# Altium PCB adapter.PcbDoc
Units mm, origin at the board's own origin, x right, y up, seen from the top; angles counter-clockwise.
Board outline 44.32 x 45.25 mm, 2 copper layers (Top Layer, Bottom Layer); 5 components, 0 nets, 22 pads, 0 vias.
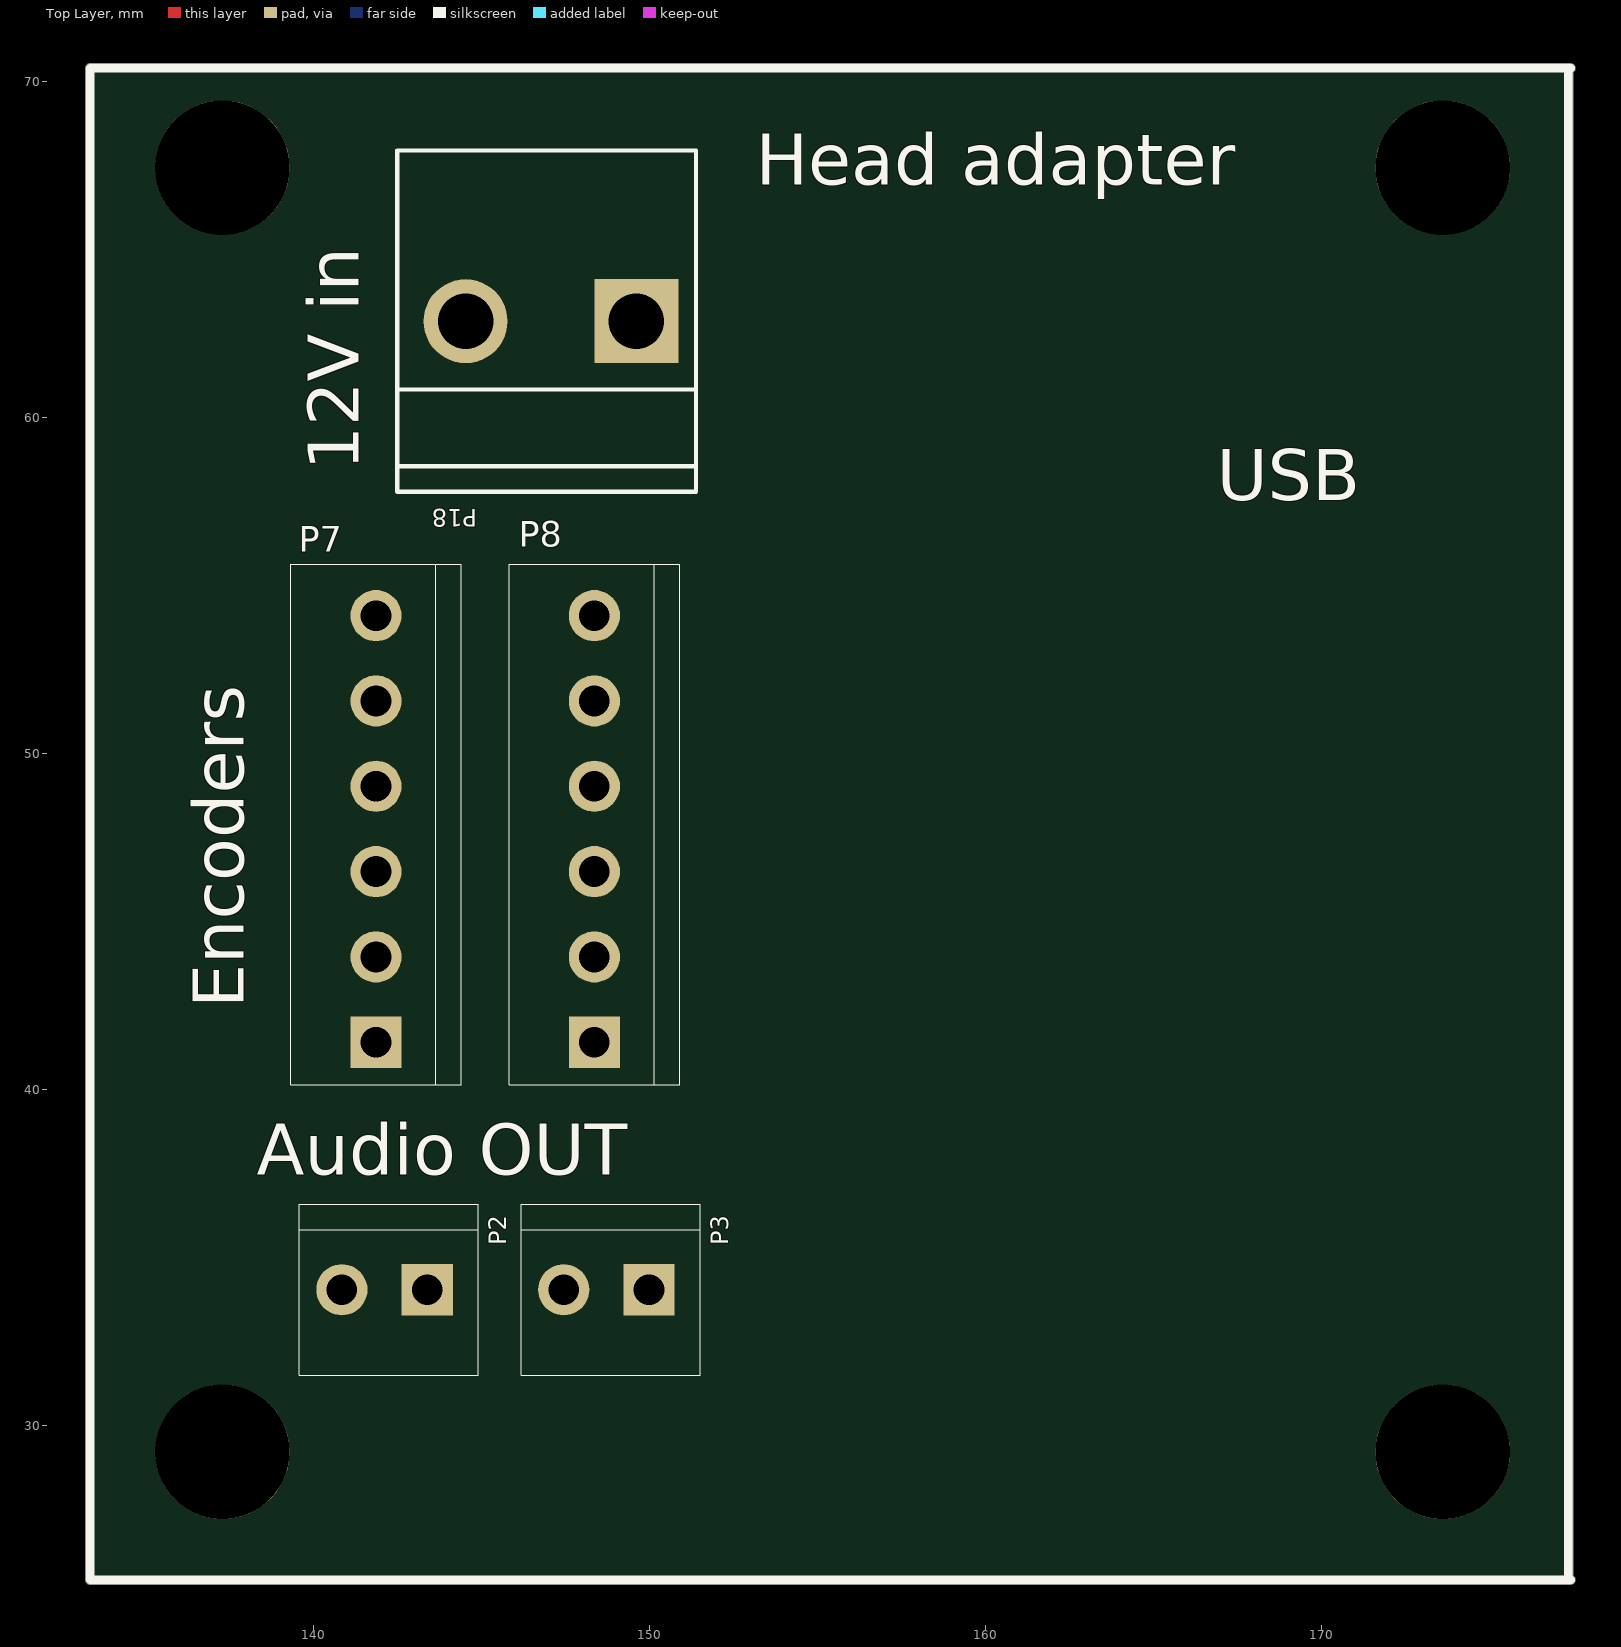
[diagram p0: Top Layer view]
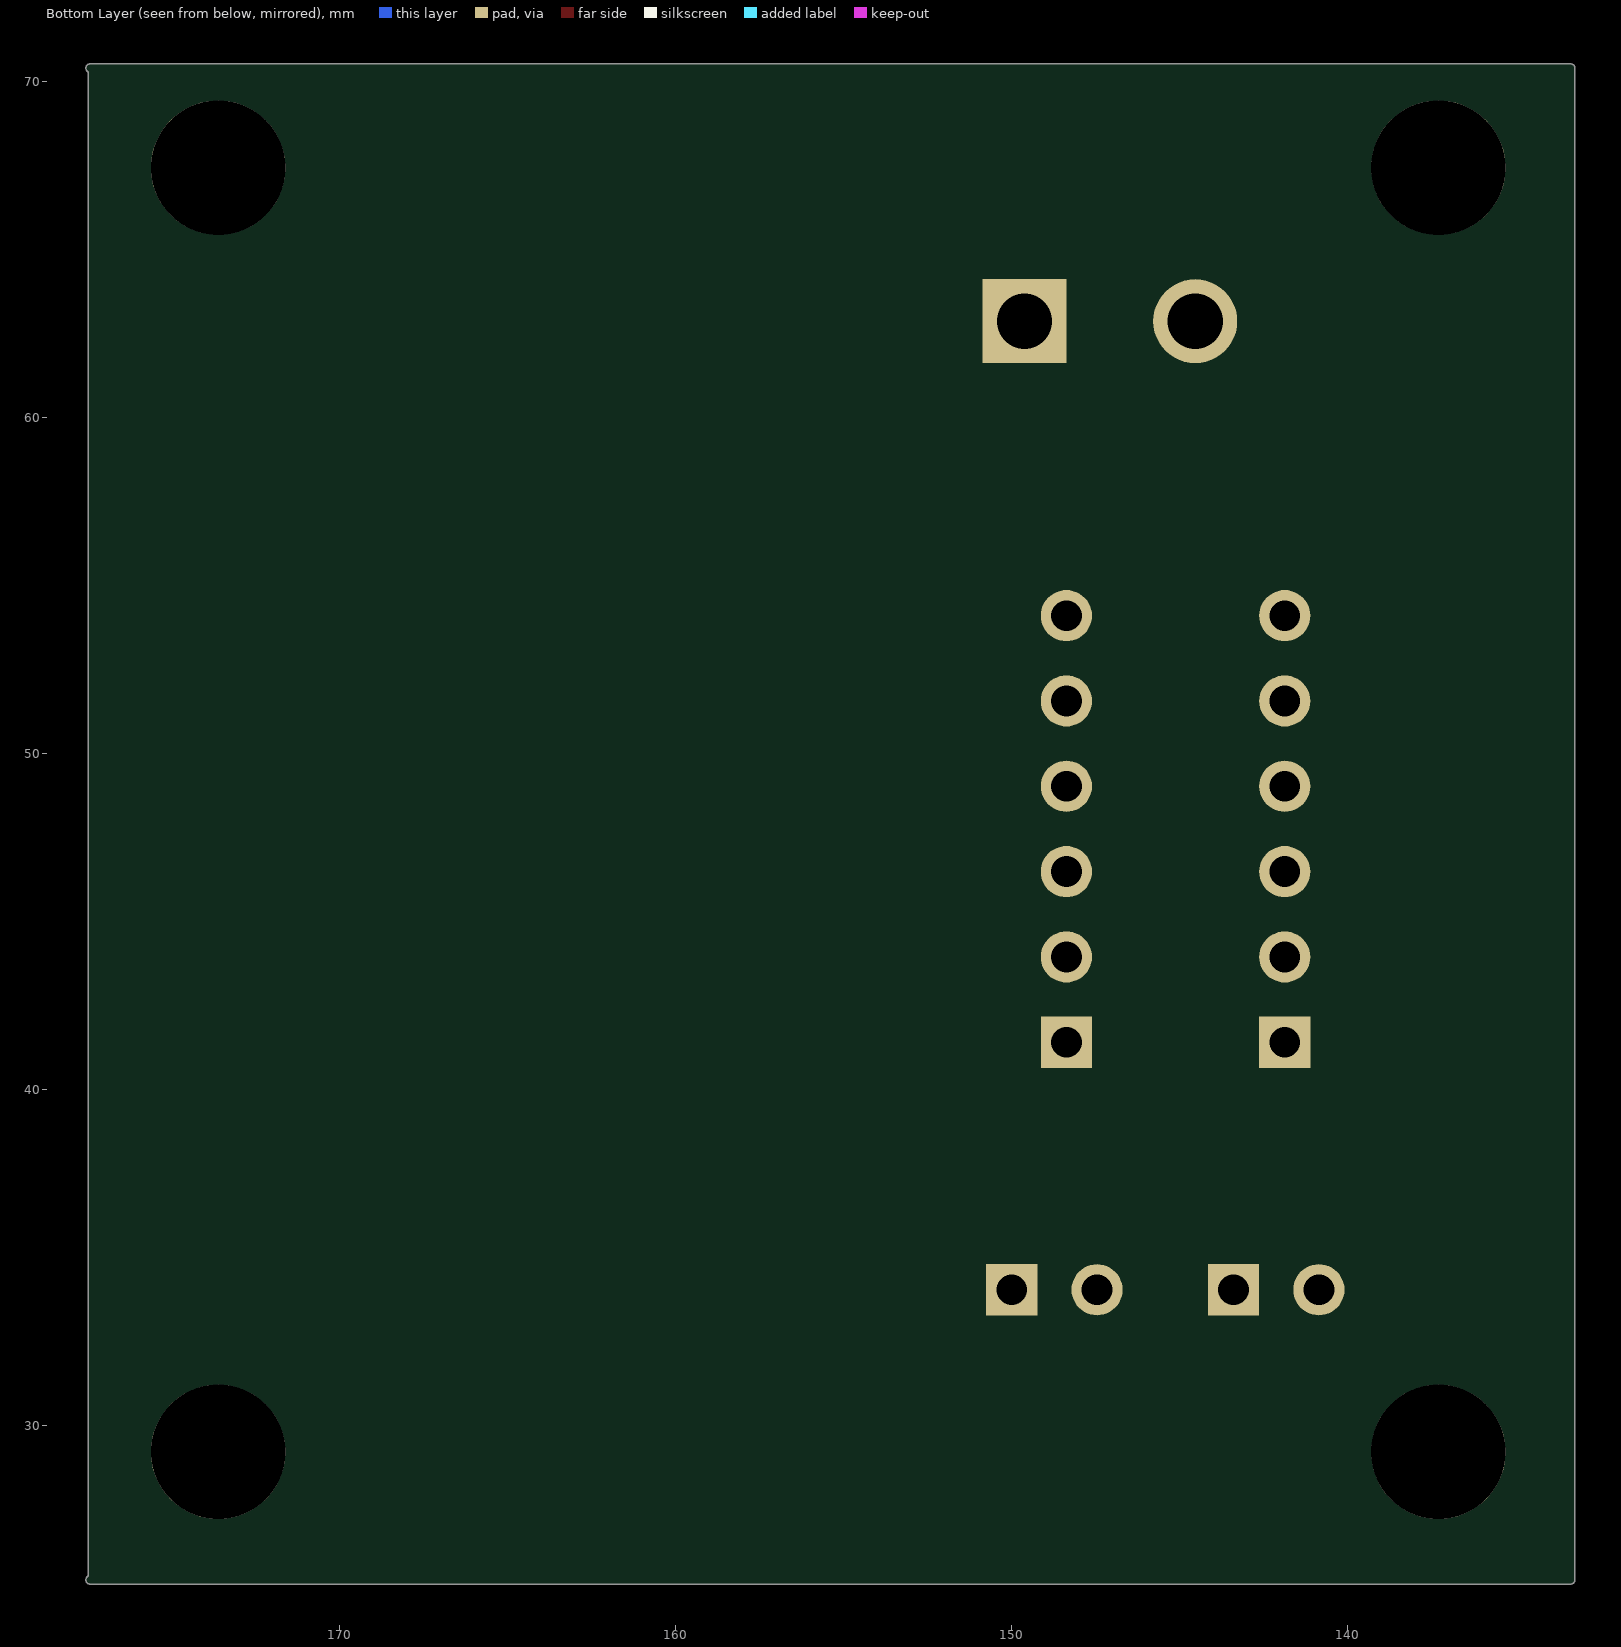
[diagram p1: Bottom Layer view, seen from below]

## Layer stack, top to bottom
Top Solder: solder mask 0.0102, Solder Resist, Dk 3.5
Top Layer: signal copper 0.0356
Dielectric 1: dielectric 0.32, FR-4, Dk 4.8
Bottom Layer: signal copper 0.0356
Bottom Solder: solder mask 0.0102, Solder Resist, Dk 3.5

## Board outline
133.223,25.4 133.223,70.358 cw(c133.35,70.358) 133.224,70.378 cw(c133.35,70.398) 133.35,70.525 177.419,70.525 cw(c177.419,70.398) 177.546,70.398 cw(c177.419,70.398) 177.476,70.284 177.476,25.514 cw(c177.419,25.4) 177.546,25.4 cw(c177.419,25.4) 177.419,25.273 133.35,25.273 cw(c133.35,25.4)

## Design rules (kind name [scope] priority, off if disabled: settings)
Clearance [All] p1: gap=0.254 ignorepadtopadclearanceinfootprint=FALSE except(0: Arc-Hole Track-Hole SMDPad-Hole THPad-Hole Via-Hole Fill-Hole Poly-Hole Region-Hole Text-Hole)
PolygonConnect [All] p1: connectstyle=Relief reliefconductorwidth=0.254 reliefentries=4 polygonreliefangle="90 Angle" airgapwidth=0.254
RoutingVias [All] p1: holewidth=0.711 width=1.27 viastyle="Through Hole" minholewidth=0.711 minwidth=1.27 maxholewidth=0.711 maxwidth=1.27
SolderMaskExpansion [All] p1: expansion=0.102
Width [All] p1: maxlimit=0.254 minlimit=0.254 preferedwidth=0.254
30 further rules are at their usual default settings.

## Components (designator, comment, footprint, x,y, rotation, side; value= is the part's Value field where it differs from the comment)
P2 "WF2" WF-2 143.383,34.036 r180 top
P3 "WF2" WF-2 149.987,34.036 r180 top (schematic designator P2)
P7 "6-pin" WF-6 141.859,41.402 r90 top
P8 "6-pin" WF-6 148.359,41.402 r90 top
P18 "MPW-2" MPW-2 149.606,62.865 r180 top

## Footprints (in the part's own frame and the unit in brackets; to place one, negate y for a bottom-side part, rotate by r counter-clockwise, add the part's x,y. Pads: shape width x height; smd on the part's side, far side on the other; paste and mask are expansions set on the pad)
MPW-2 [mm]
  rect 2.5x2.5 hole 1.65: 1(0,0)
  round 2.5 hole 1.65: 2(5.08,0)
  silkscreen extent -1.78,-5.08 7.11,5.08
WF-2 [mil]
  rect 60x60 hole 36: 1(0,0)
  round 60 hole 36: 2(100,0)
  silkscreen extent -60,-100 150,100, body extent -60,-100 150,100, height 394
WF-6 [mil]
  rect 60x60 hole 36: 1(0,0)
  round 60 hole 36: 2(100,0) 3(200,0) 4(300,0) 5(400,0) 6(500,0)
  silkscreen extent -50,-100 560,100, body extent -50,-100 560,100, height 394

## Part data
P2 P3 P7 P8 P18: Type=朽琥胳

## Free pads (board coordinates)
  round 4 hole 4: 1(137.287,29.21) 1(137.287,67.437) 1(173.609,29.21) 1(173.609,67.437)

## Nets (pads, with @x,y where several pads share a name; then routed paths per layer and width w, separated by ;. In a path a pad name is that pad's centre, name@x,y a point inside that pad or via, vN(x,y) a via of type N, cw(c..) or ccw(c..) an arc to the next point about the centre after c; other vN are vias at no path point)
pads on no net: P2.1 P2.2 P3.1 P3.2 P7.1 P7.2 P7.3 P7.4 P7.5 P7.6 P8.1 P8.2 P8.3 P8.4 P8.5 P8.6 P18.1 P18.2

## Silkscreen, mask and mechanical layers (free items; w line width, h text height)
Top Overlay:
  lines w0.254: 133.35,70.358 133.35,25.4 177.419,25.4 ; 133.35,70.398 177.419,70.398 ; 177.349,25.4 177.349,70.358
  text "Head adapter" at 153.162,66.929 h1.52
  text "12V in" at 141.351,58.42 h1.52 r90
  text "USB" at 166.878,57.531 h1.52
  text "Encoders" at 137.922,42.418 h1.52 r90
  text "Audio OUT" at 138.303,37.465 h1.52

## Dimensions
133.35,25.4 to 133.35,70.398 on Top Overlay
133.35,70.358 to 177.349,70.358 on Top Overlay